# Altium PCB pcb.PcbDoc
Units mm, origin at the board's own origin, x right, y up, seen from the top; angles counter-clockwise.
Board outline 190.25 x 80.25 mm, 2 copper layers (Top Layer, Bottom Layer); 23 components, 59 nets, 225 pads, 0 vias.
Unrouted connection lines stored in the file: 89.
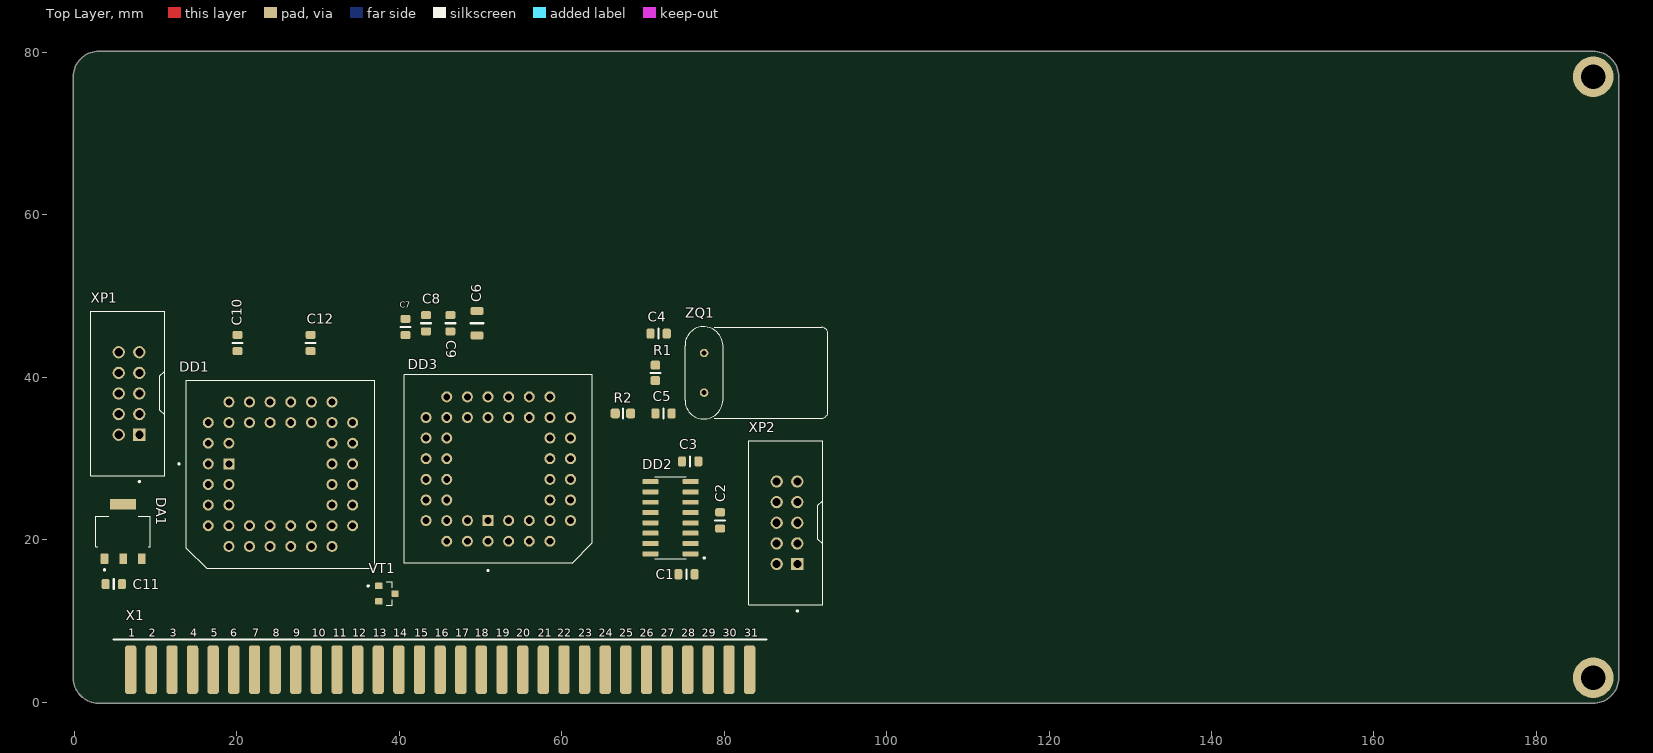
[diagram p0: Top Layer view]
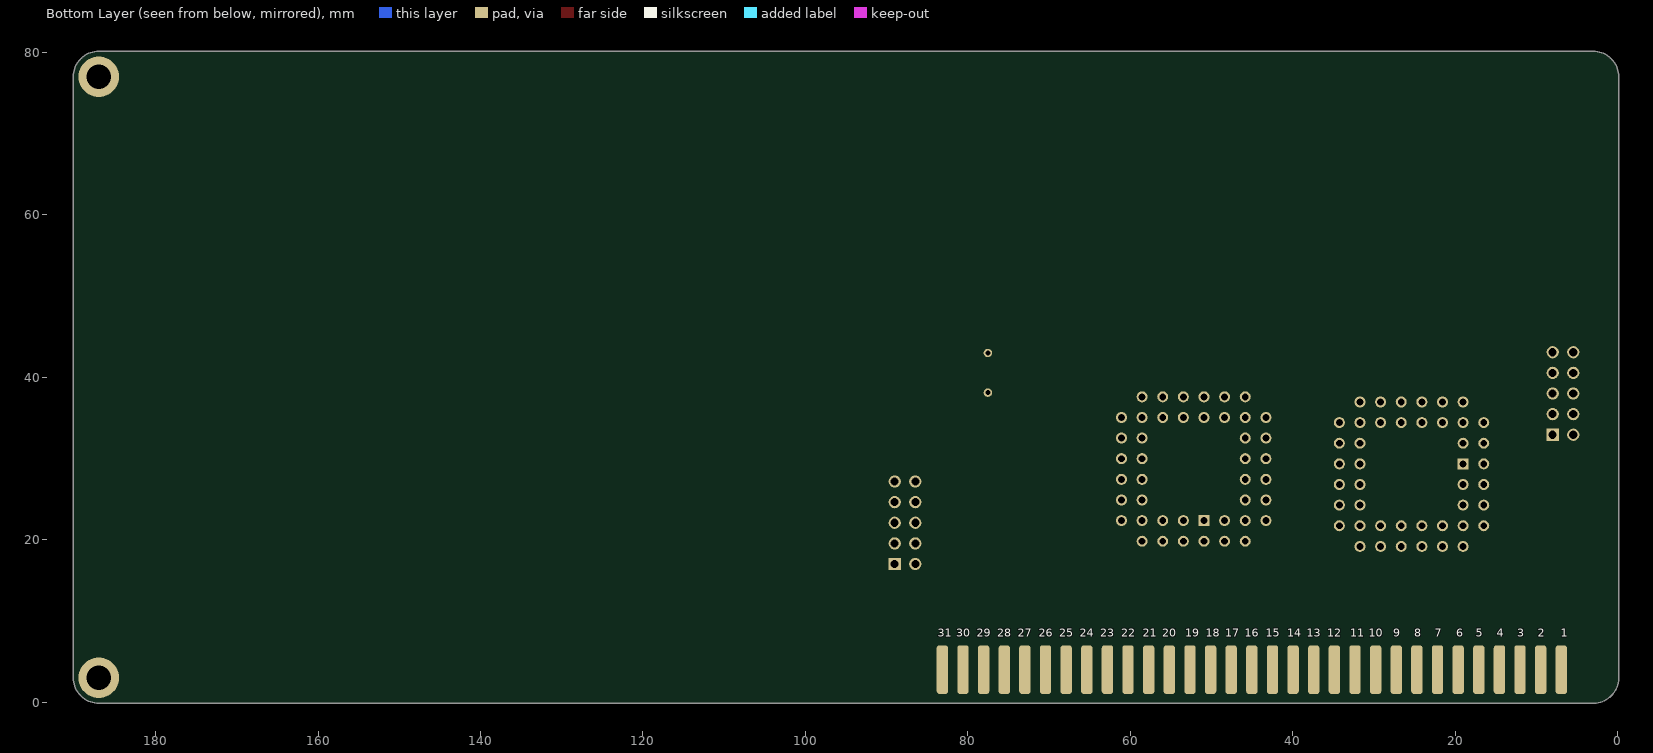
[diagram p1: Bottom Layer view, seen from below]

## Layer stack, top to bottom
Top Solder: solder mask 0.0102, Solder Resist, Dk 3.5
Top Layer: signal copper 0.0356
Dielectric 1: dielectric 0.32, FR-4, Dk 4.8
Bottom Layer: signal copper 0.0356
Bottom Solder: solder mask 0.0102, Solder Resist, Dk 3.5

## Board outline
-0.126,2.901 cw(c0,2.921) -0.127,2.921 -0.127,76.962 cw(c0,76.962) -0.126,76.981 cw(c0,77) -0.127,77 cw(c3,77) 3,80.127 cw(c3,80) 3.019,80.126 cw(c3.038,80) 3.038,80.127 187,80.127 cw(c187,77) 190.127,77 190.127,3 cw(c187,3) 187,-0.127 2.921,-0.127 cw(c2.921,0) 2.901,-0.126 cw(c3,3)

## Design rules (kind name [scope] priority, off if disabled: settings)
Clearance [All] p1: gap=0.254 ignorepadtopadclearanceinfootprint=FALSE except(0: Arc-Hole Track-Hole SMDPad-Hole THPad-Hole Via-Hole Fill-Hole Poly-Hole Region-Hole Text-Hole; 0.2: Arc-Arc Arc-Track Arc-SMDPad Track-Track Track-SMDPad SMDPad-SMDPad THPad-THPad)
PolygonConnect [All] p1: connectstyle=Relief reliefconductorwidth=0.254 reliefentries=4 polygonreliefangle="90 Angle" airgapwidth=0.254
RoomDefinition main [InComponentClass('main')] p1: confinementstyle=ConfineIn formatcopy=TRUE lockcomponents=FALSE outline 0,0 190.1,0 190.1,80.2 0,80.2
RoutingVias [All] p1: holewidth=0.2 width=0.4 viastyle="Through Hole" minholewidth=0.2 minwidth=0.4 maxholewidth=0.2 maxwidth=0.4
SolderMaskExpansion [All] p1: expansion=0.102
Width [All] p1: maxlimit=0.254 minlimit=0.2 preferedwidth=0.254 minimp=50.000000 maximp=50.000000 favimp=50.000000
30 further rules are at their usual default settings.

## Components (designator, comment, footprint, x,y, rotation, side; value= is the part's Value field where it differs from the comment)
C1 "0.1uF" C0805 75.362,15.748 r180 top
C2 "0.1uF" C0805 79.502,22.377 r270 top
C3 "0.1uF" C0805 75.819,29.642 r180 top
C4 "30пФ" C0805 71.932,45.373 r180 top
C5 "50пФ" C0805 72.532,35.547 r180 top
C6 "22uF" С1206 49.566,46.651 r90 top
C7 "10uF" C0805 40.763,46.185 r90 top
C8 "10uF" C0805 43.296,46.651 r90 top
C9 "10uF" C0805 46.296,46.651 r90 top
C10 "10uF" C0805 20.086,44.218 r90 top
C11 "10uF" C0805 4.851,14.529 r180 top
C12 "10uF" C0805 29.086,44.218 r90 top
DA1 "AMS1117-3.3" SOT229P700X180-4N 6,21 r90 top
DD1 "EPM3032ALC44" PLCC-44-R 25.375,28.067 r90 top
DD2 "MAX3232ID" SOIC127P600X175-16N 73.406,22.708 r180 top
DD3 "TL16C550CFN" PLCC-44-R 52.197,28.702 r180 top
R1 "1M" R0805 71.532,40.547 r270 top
R2 "1.5K" R0805 67.532,35.547 r180 top
VT1 "BC847" BC847 38.481,13.36 r0 top
X1 "Bus" BUS 45,4 r0 top
XP1 "BH-10" BH-10 6.73,38 r90 top
XP2 "BH-10" BH-10 87.737,22.083 r90 top
ZQ1 "1.8432 MHz" XTAL_HC-49U 77.532,40.547 r270 top

## Footprints (in the part's own frame and the unit in brackets; to place one, negate y for a bottom-side part, rotate by r counter-clockwise, add the part's x,y. Pads: shape width x height; smd on the part's side, far side on the other; paste and mask are expansions set on the pad)
BC847 [mm]
  rrect25% 0.9x0.8 smd: 1(-1,0.95) 2(-1,-0.95) 3(1,0)
  silkscreen extent -2.4,-1.45 0.65,1.45, body extent -1.33,-1.52 1.27,1.52, height 1.2
BH-10 [mm]
  rect 1.508x1.508 / inner round 1.508 / far side rect 1.508x1.508 hole 1: 1(-5.08,-1.27)
  round 1.508 hole 1: 2(-5.08,1.27) 3(-2.54,-1.27) 4(-2.54,1.27) 5(0,-1.27) 6(0,1.27) 7(2.54,-1.27) 8(2.54,1.27) 9(5.08,-1.27) 10(5.08,1.27)
  silkscreen extent -10.95,-4.4 10.1,4.7, body extent -10.1,-4.39 10.1,4.7, height 9.09
BUS [mm]
  rrect50% 1.4x6 smd: 1(-38.065,0) 2(-35.525,0) 3(-32.985,0) 4(-30.445,0) 5(-27.905,0) 6(-25.365,0) 7(-22.825,0) 8(-20.285,0) 9(-17.745,0) 10(-15.205,0) 11(-12.665,0) 12(-10.125,0) 13(-7.585,0) 14(-5.045,0) 15(-2.505,0) 16(0.035,0) 17(2.575,0) 18(5.115,0) 19(7.655,0) 20(10.195,0) 21(12.735,0) 22(15.275,0) 23(17.815,0) 24(20.355,0) 25(22.895,0) 26(25.435,0) 27(27.975,0) 28(30.515,0) 29(33.055,0) 30(35.595,0) 31(38.135,0)
  rrect50% 1.4x6 smd far side: 32(-38.06,0) 33(-35.525,0) 34(-32.985,0) 35(-30.445,0) 36(-27.905,0) 37(-25.365,0) 38(-22.825,0) 39(-20.285,0) 40(-17.745,0) 41(-15.205,0) 42(-12.665,0) 43(-10.125,0) 44(-7.585,0) 45(-5.045,0) 46(-2.505,0) 47(0.035,0) 48(2.575,0) 49(5.115,0) 50(7.655,0) 51(10.195,0) 52(12.735,0) 53(15.275,0) 54(17.815,0) 55(20.355,0) 56(22.895,0) 57(25.435,0) 58(27.975,0) 59(30.515,0) 60(33.055,0) 61(35.595,0) 62(38.135,0)
C0805 [mm] "Chip_Capasitor_0805"
  rrect50% 1x1.25 smd mask+0.102: 1(-1,0) 2(1,0)
  silkscreen extent 0,-0.6 0,0.6, body extent -1,-0.64 1,0.65, height 1.35
PLCC-44-R [mm]
  rect 1.358x1.358 hole 0.85: 1(1.27,6.35)
  round 1.358 hole 0.85: 2(-1.27,8.89) 3(-1.27,6.35) 4(-3.81,8.89) 5(-3.81,6.35) 6(-6.35,8.89) 7(-8.89,6.35) 8(-6.35,6.35) 9(-8.89,3.81) 10(-6.35,3.81) 11(-8.89,1.27) 12(-6.35,1.27) 13(-8.89,-1.27) 14(-6.35,-1.27) 15(-8.89,-3.81) 16(-6.35,-3.81) 17(-8.89,-6.35) 18(-6.35,-8.89) 19(-6.35,-6.35) 20(-3.81,-8.89) 21(-3.81,-6.35) 22(-1.27,-8.89) 23(-1.27,-6.35) 24(1.27,-8.89) 25(1.27,-6.35) 26(3.81,-8.89) 27(3.81,-6.35) 28(6.35,-8.89) 29(8.89,-6.35) 30(6.35,-6.35) 31(8.89,-3.81) 32(6.35,-3.81) 33(8.89,-1.27) 34(6.35,-1.27) 35(8.89,1.27) 36(6.35,1.27) 37(8.89,3.81) 38(6.35,3.81) 39(8.89,6.35) 40(6.35,8.89) 41(6.35,6.35) 42(3.81,8.89) 43(3.81,6.35) 44(1.27,8.89)
  silkscreen extent -11.59,-11.59 11.59,12.6, body extent -11.74,-11.74 11.74,11.74, height 8.31
R0805 [mm] "Chip_Resistor_0805"
  rrect50% 1.14x1.2 smd mask+0.1: 1(-0.95,0) 2(0.95,0)
  silkscreen extent 0,-0.6 0,0.6, body extent -1.07,-0.67 1.23,0.68, height 0.76
SOIC127P600X175-16N [mm]
  rrect25% 1.97x0.6 smd: 1(-2.475,4.445) 2(-2.475,3.175) 3(-2.475,1.905) 4(-2.475,0.635) 5(-2.475,-0.635) 6(-2.475,-1.905) 7(-2.475,-3.175) 8(-2.475,-4.445) 9(2.475,-4.445) 10(2.475,-3.175) 11(2.475,-1.905) 12(2.475,-0.635) 13(2.475,0.635) 14(2.475,1.905) 15(2.475,3.175) 16(2.475,4.445)
  silkscreen extent -4.25,-5.06 1.95,5.06, body extent -3,-4.95 3,4.95, height 1.75
SOT229P700X180-4N [mm]
  rrect15% 1.31x0.93 smd: 1(-3.345,2.29) 2(-3.345,0) 3(-3.345,-2.29)
  rrect15% 1.31x3.24 smd: 4(3.345,0)
  silkscreen extent -4.8,-3.36 1.86,3.36, body extent -3.5,-3.25 3.5,3.25, height 1.8
XTAL_HC-49U [mm]
  round 1.03 hole 0.63: 1(-2.44,0) 2(2.44,0)
  silkscreen extent -5.68,-2.33 5.68,15.24, body extent -5.51,-2.5 5.84,2.5, height 14.22
С1206 [mm] "Chip_Capasitor_1206"
  rrect50% 1x1.6 smd mask+0.102: 1(-1.5,0) 2(1.5,0)
  silkscreen extent 0,-0.8 0,0.8, body extent -1.6,-0.81 1.6,0.81, height 1.11

## Part data
C1 C2 C3 C4 C5 C6 C7 C8 C9 C10 C11 C12: library part CapCer
DD1: "44-Pin PLCC44"
DD2: "3-V to 5.5-V multichannel RS-232 line driver & receiver 16-SOIC -40 to 85", Package="SOIC-16 Texas Instruments", Availability=Good, DigiKey-Purchase-URL=https://snapeda.com/shop?store=DigiKey&id=215166, MF="Texas Instruments", Mouser-Purchase-URL=https://snapeda.com/shop?store=Mouser&id=215166, MP=MAX3232ID, Price=None, SnapEDA_Link=https://www.snapeda.com/parts/MAX3232ID/Texas%20Instruments/view-part/215166/?ref=snap, Texas_Instruments-Purchase-URL=https://snapeda.com/shop?store=Texas+Instruments&id=215166
DD3: "ASYNCHRONOUS COMMUNICATIONS ELEMENT", Package=None, Availability=Unavailable, MP=TL16C550CFN, Price=None
R1 R2: library part Res
VT1: "NPN Transistor"
XP1 XP2: "10 Position Total Dual Row 2.54 mm Pitch Straight Male Shrouded Box Header", Package=None, Check_prices=https://www.snapeda.com/parts/SBH11-PBPC-D05-ST-BK/Sullins+Connector+Solutions/view-part/?ref=eda, MF="Sullins Connector", MP=SBH11-PBPC-D05-ST-BK, SnapEDA_Link=https://www.snapeda.com/parts/SBH11-PBPC-D05-ST-BK/Sullins+Connector+Solutions/view-part/?ref=snap
ZQ1: library part HC-49U_1.8432

## Free pads (board coordinates)
  round 5 hole 3: 3(187,3) 3(187,77)

## Nets (pads, with @x,y where several pads share a name; then routed paths per layer and width w, separated by ;. In a path a pad name is that pad's centre, name@x,y a point inside that pad or via, vN(x,y) a via of type N, cw(c..) or ccw(c..) an arc to the next point about the centre after c; other vN are vias at no path point)
+3.3V: C10.1 C11.1 C12.1 DA1.2 DD1.3 DD1.15 DD1.23 DD1.35 XP1.4
+5V: C6.1 C7.1 C8.1 C9.1 DA1.3 DD2.16 DD3.14 DD3.15 DD3.44 VT1.3 X1.34
A0: DD1.24 X1.40
A1: DD1.25 X1.41
A2: DD1.26 X1.42
A3: DD1.27 X1.43
A4: DD1.28 X1.55
A5: DD1.29 X1.54
A6: DD1.31 X1.53
A7: DD1.33 X1.52
A8: DD1.34 DD3.31 X1.26
A9: DD1.37 DD3.30 X1.58
A10: DD1.39 DD3.29 X1.27
A11: DD1.41 X1.59
A12: DD1.12 X1.33
A13: DD1.6 X1.2
A14: DD1.5 X1.32
A15: DD1.4 X1.1
BOUT: DD3.10 DD3.17
C1+: C1.1 DD2.1
C1-: C1.2 DD2.3
C2+: C2.1 DD2.5
C2-: C2.2 DD2.4
CLK: DD1.43
CS2: DD1.11 DD3.16
CTS: DD2.9 DD3.40
D0: DD3.2
D1: DD3.3
D2: DD3.4
D3: DD3.5
D4: DD3.6
D5: DD3.7
D6: DD3.8
D7: DD3.9
GND: C4.1 C5.1 C6.2 C7.2 C8.2 C9.2 C10.2 C11.2 C12.2 DA1.1 DD1.10 DD1.22 DD1.30 DD1.42 DD2.15 DD3.21 DD3.22 DD3.25 DD3.28 X1.30 X1.37 X1.38 X1.45 X1.61 XP1.2 XP1.10 XP2.5
IOGE: DD1.9 VT1.1
IORQ: DD1.44 X1.17
IORQGE: VT1.2 X1.44
NetC5_2: C5.2 R1.2 R2.1 ZQ1.2
RD: DD3.24 X1.18
RES: DD1.1
RSCTS: DD2.7 XP2.7
RSRTS: DD2.8 XP2.8
RSRX: DD2.14 XP2.2
RSTX: DD2.13 XP2.3
RSV+: C3.2 DD2.6
RSV-: C3.1 DD2.2
RTS_3V: DD1.8 DD2.10
RTS_5V: DD1.18 DD3.36
RX: DD2.12 DD3.11
TCK: DD1.32 XP1.1
TDI: DD1.7 XP1.9
TDO: DD1.38 XP1.3
TMS: DD1.13 XP1.5
TX_3V: DD1.40 DD2.11
TX_5V: DD1.21 DD3.13
WR: DD3.20 X1.19
XIN: C4.2 DD3.18 R1.1 ZQ1.1
XOUT: DD3.19 R2.2
pads on no net: DA1.4 DD1.2 DD1.14 DD1.16 DD1.17 DD1.19 DD1.20 DD1.36 DD3.1 DD3.12 DD3.23 DD3.26 DD3.27 DD3.32 DD3.33 DD3.34 DD3.35 DD3.37 DD3.38 DD3.39 DD3.41 DD3.42 DD3.43 X1.3 X1.4 X1.5 X1.6 X1.7 X1.8 X1.9 X1.10 X1.11 X1.12 X1.13 X1.14 X1.15 X1.16 X1.20 X1.21 X1.22 X1.23 X1.24 X1.25 X1.28 X1.29 X1.31 X1.35 X1.36 X1.39 X1.46 X1.47 X1.48 X1.49 X1.50 X1.51 X1.56 X1.57 X1.60 X1.62 XP1.6 XP1.7 XP1.8 XP2.1 XP2.4 XP2.6 XP2.9 XP2.10

## Silkscreen, mask and mechanical layers (free items; w line width, h text height)
Top Overlay:
  lines w0.254: 4.839,7.696 85.239,7.696

## Text inside footprints (layer, text, board x,y; h text height)
X1: Top Overlay "17" at 46.905,8.064 h1; Top Overlay "18" at 49.318,8.064 h1; Top Overlay "20" at 54.398,8.064 h1; Top Overlay "19" at 51.858,8.064 h1; Top Overlay "23" at 62.018,8.064 h1; Top Overlay "24" at 64.558,8.064 h1; Top Overlay "22" at 59.478,8.064 h1; Top Overlay "21" at 57.065,8.064 h1; Top Overlay "29" at 77.258,8.064 h1; Top Overlay "30" at 79.798,8.064 h1; Top Overlay "31" at 82.465,8.064 h1; Top Overlay "27" at 72.178,8.064 h1; Top Overlay "28" at 74.718,8.064 h1; Top Overlay "26" at 69.638,8.064 h1; Top Overlay "25" at 67.098,8.064 h1; Top Overlay "9" at 26.966,8.064 h1; Top Overlay "10" at 29.252,8.064 h1; Top Overlay "12" at 34.205,8.064 h1; Top Overlay "11" at 31.792,8.064 h1; Top Overlay "15" at 41.825,8.064 h1; Top Overlay "16" at 44.365,8.064 h1; Top Overlay "14" at 39.285,8.064 h1; Top Overlay "13" at 36.745,8.064 h1; Top Overlay "5" at 16.806,8.064 h1; Top Overlay "6" at 19.219,8.064 h1; Top Overlay "8" at 24.426,8.064 h1; Top Overlay "7" at 21.886,8.064 h1; Top Overlay "3" at 11.726,8.064 h1; Top Overlay "4" at 14.266,8.064 h1; Top Overlay "2" at 9.186,8.064 h1; Top Overlay "1" at 6.646,8.064 h1; Bottom Overlay "25" at 68.749,8.064 h1; Bottom Overlay "28" at 76.369,8.064 h1; Bottom Overlay "22" at 61.129,8.064 h1; Bottom Overlay "19" at 53.255,8.064 h1; Bottom Overlay "12" at 35.729,8.064 h1; Bottom Overlay "31" at 83.735,8.064 h1; Bottom Overlay "30" at 81.449,8.064 h1; Bottom Overlay "29" at 78.909,8.064 h1; Bottom Overlay "26" at 71.289,8.064 h1; Bottom Overlay "27" at 73.829,8.064 h1; Bottom Overlay "24" at 66.209,8.064 h1; Bottom Overlay "23" at 63.669,8.064 h1; Bottom Overlay "21" at 58.462,8.064 h1; Bottom Overlay "20" at 56.049,8.064 h1; Bottom Overlay "16" at 45.889,8.064 h1; Bottom Overlay "17" at 48.302,8.064 h1; Bottom Overlay "13" at 38.269,8.064 h1; Bottom Overlay "14" at 40.682,8.064 h1; Bottom Overlay "15" at 43.349,8.064 h1; Bottom Overlay "11" at 32.935,8.064 h1; Bottom Overlay "10" at 30.649,8.064 h1; Bottom Overlay "7" at 22.521,8.064 h1; Bottom Overlay "8" at 25.061,8.064 h1; Bottom Overlay "4" at 14.901,8.064 h1; Bottom Overlay "3" at 12.361,8.064 h1; Bottom Overlay "18" at 50.715,8.064 h1; Bottom Overlay "9" at 27.601,8.064 h1; Bottom Overlay "6" at 19.854,8.064 h1; Bottom Overlay "5" at 17.441,8.064 h1; Bottom Overlay "2" at 9.821,8.064 h1; Bottom Overlay "1" at 7.027,8.064 h1